# Altium PCB NetworkModule_highspeed V3.PcbDoc (part 3 of 3)
Units mm, origin at the board's own origin, x right, y up, seen from the top; angles counter-clockwise.
Board outline 21 x 36.1 mm, 6 copper layers (Top, GND, Inner3, Inner4, PWR, Bottom), stack 0.74 mm thick; 111 components, 125 nets, 539 pads, 397 vias.
Unrouted connection lines stored in the file: 274.
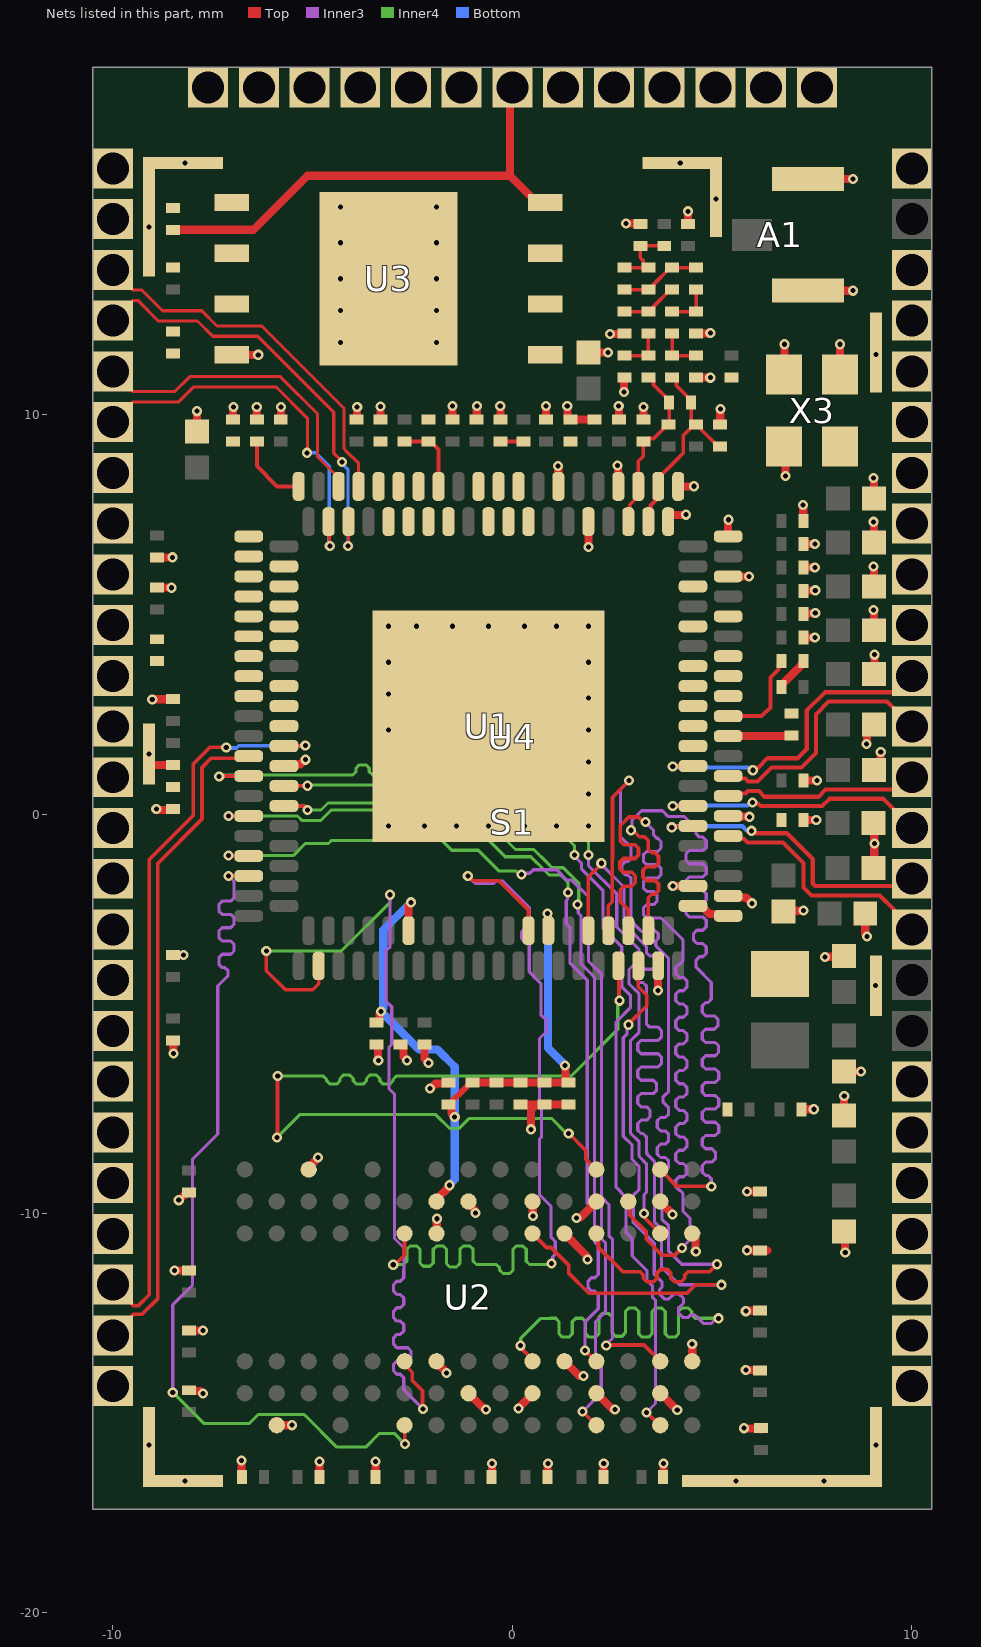
[diagram p7: the nets of this part, all layers, seen from the top]

## Via types
v1: diameter 0.254, hole 0.127, Top to Bottom, 397 vias

## Nets (pads, with @x,y where several pads share a name; then routed paths per layer and width w, separated by ;. In a path a pad name is that pad's centre, name@x,y a point inside that pad or via, vN(x,y) a via of type N, cw(c..) or ccw(c..) an arc to the next point about the centre after c; other vN are vias at no path point) (continued)
DDR_D9: U1.112 U2.C2 | length 23.2
  Top w0.092: U2.C2@2.9,-9.7 2.938,-9.738 2.938,-10.042 3.349,-10.453 3.349,-10.645 3.753,-11.049 4.058,-11.049 v1(4.246,-10.861) ; U1.112@2.9,-2.92 2.9,-2.392 2.794,-2.286 2.697,-2.189 2.697,-1.894 2.784,-1.807 2.988,-1.807 3.075,-1.72 3.075,-1.547 2.988,-1.461 2.779,-1.461 2.693,-1.374 2.693,-1.201 2.779,-1.114 3.069,-1.114 3.156,-1.028 3.156,-0.855 3.069,-0.768 2.784,-0.768 2.697,-0.681 2.697,-0.508 2.697,-0.293 2.913,-0.076 3.157,-0.076 3.284,-0.203 v1(3.327,-0.203)
  Inner3 w0.079: v1(3.327,-0.203) 3.531,-0.406 3.531,-0.483 3.531,-0.522 3.614,-0.605 3.637,-0.605 3.72,-0.688 3.72,-0.855 3.637,-0.938 3.36,-0.938 3.277,-1.021 3.277,-1.188 3.36,-1.271 3.637,-1.271 3.72,-1.354 3.72,-1.52 3.637,-1.604 3.36,-1.604 3.277,-1.687 3.277,-1.853 3.36,-1.936 3.535,-1.936 3.618,-2.02 3.618,-2.186 3.535,-2.269 3.36,-2.269 3.277,-2.352 3.277,-2.519 3.36,-2.602 3.719,-2.602 3.759,-2.642 4.268,-3.151 4.268,-3.302 4.268,-3.674 4.185,-3.757 4.173,-3.757 4.09,-3.841 4.09,-4.007 4.173,-4.09 4.284,-4.09 4.367,-4.173 4.367,-4.34 4.284,-4.423 4.173,-4.423 4.09,-4.506 4.09,-4.673 4.173,-4.756 4.284,-4.756 4.367,-4.839 4.367,-5.005 4.284,-5.088 4.173,-5.088 4.09,-5.172 4.09,-5.338 4.173,-5.421 4.284,-5.421 4.367,-5.504 4.367,-5.671 4.284,-5.754 4.173,-5.754 4.09,-5.837 4.09,-6.004 4.173,-6.087 4.284,-6.087 4.367,-6.17 4.367,-6.336 4.284,-6.42 4.173,-6.42 4.09,-6.503 4.09,-6.669 4.173,-6.752 4.284,-6.752 4.367,-6.836 4.367,-7.002 4.284,-7.085 4.173,-7.085 4.09,-7.168 4.09,-7.335 4.173,-7.418 4.284,-7.418 4.367,-7.501 4.367,-7.668 4.284,-7.751 4.173,-7.751 4.09,-7.834 4.09,-8 4.173,-8.083 4.284,-8.083 4.367,-8.167 4.367,-8.333 4.284,-8.416 4.173,-8.416 4.09,-8.499 4.09,-8.666 4.173,-8.749 4.284,-8.749 4.367,-8.832 4.367,-8.999 4.284,-9.082 4.173,-9.082 4.09,-9.165 4.09,-9.331 4.173,-9.415 4.185,-9.415 4.268,-9.498 4.268,-9.944 ; v1(4.246,-10.861) 4.445,-10.662 4.445,-10.121 4.268,-9.944 ; 4.268,-9.954 4.268,-9.944 ; 4.273,-9.948 4.277,-9.948
DDR_D10: U1.68 U2.D7 | length 22.9
  Top w0.092: v1(-7.112,-0.051) -6.604,-0.05 U1.68@-6.592,-0.038 ; v1(1.812,-13.43) 1.821,-13.43 2.091,-13.7 U2.D7@2.1,-13.7
  Inner3 w0.079: v1(1.391,-1.963) 1.378,-1.976 1.378,-2.141 1.345,-2.174 1.345,-2.746 1.445,-2.846 1.445,-3.734 1.873,-4.162 1.873,-9.743 2.053,-9.923 2.053,-10.706 2.075,-10.728 2.147,-10.8 2.147,-11.43 2.147,-11.526 2.064,-11.61 1.977,-11.61 1.893,-11.693 1.893,-11.859 1.977,-11.942 2.064,-11.942 2.147,-12.026 2.147,-12.065 2.147,-12.385 1.812,-12.72 v1(1.812,-13.43)
  Inner4 w0.078: v1(-7.112,-0.051) -5.382,-0.051 -5.266,-0.166 -4.806,-0.166 -4.542,0.097 -3.336,0.097 -3.285,0.148 -2.015,0.148 -1.964,0.097 -1.376,0.097 -0.731,-0.548 -0.703,-0.548 -0.181,-1.069 0.459,-1.069 0.805,-1.415 0.807,-1.415 0.915,-1.524 1.202,-1.524 1.356,-1.678 ; 1.356,-1.679 1.395,-1.718 1.395,-1.959 v1(1.391,-1.963)
DDR_D11: U1.110 U2.D3 | length 23.7
  Top w0.092: U2.D3@2.116,-10.516 2.154,-10.554 2.154,-10.85 2.76,-11.455 2.794,-11.455 3.186,-11.455 3.273,-11.542 3.273,-11.623 3.36,-11.709 3.533,-11.709 3.619,-11.623 3.619,-11.491 3.706,-11.404 3.879,-11.404 3.966,-11.491 3.966,-11.623 4.052,-11.709 4.225,-11.709 4.312,-11.623 4.312,-11.542 4.399,-11.455 4.642,-11.455 4.94,-11.455 v1(5.124,-11.271) ; U1.110@2.4,-2.92 2.4,-2.298 2.499,-2.199 2.499,-1.121 2.503,-1.116 2.503,0.42 v1(2.921,0.838)
  Inner3 w0.079: v1(2.921,0.838) 2.704,0.621 2.704,-0.568 2.972,-0.836 2.972,-0.914 2.972,-1.109 2.889,-1.192 2.828,-1.192 2.744,-1.275 2.744,-1.442 2.828,-1.525 2.889,-1.525 2.972,-1.608 2.972,-2.68 3.187,-2.896 3.207,-2.915 3.234,-2.943 3.352,-2.943 3.414,-2.881 3.532,-2.881 3.649,-2.998 3.649,-3.116 3.587,-3.178 3.587,-3.296 3.598,-3.306 3.626,-3.334 3.909,-3.617 3.909,-6.946 3.829,-7.026 3.766,-7.089 3.766,-7.206 3.909,-7.349 3.909,-7.516 3.826,-7.599 3.707,-7.599 3.624,-7.682 3.624,-7.848 3.707,-7.931 3.826,-7.931 3.909,-8.015 3.909,-8.181 3.826,-8.264 3.707,-8.264 3.624,-8.347 3.624,-8.514 3.707,-8.597 3.826,-8.597 3.909,-8.68 3.909,-8.847 3.826,-8.93 3.815,-8.93 3.732,-9.013 3.732,-9.576 3.741,-9.584 3.741,-10.142 3.909,-10.31 3.909,-10.945 4.235,-11.271 v1(5.124,-11.271)
DDR_D12: U1.111 U2.D1 | length 21.9
  Top w0.092: v1(-5.891,-8.096) -5.883,-8.088 -5.883,-6.569 v1(-5.875,-6.561) ; v1(1.408,-7.994) 1.832,-8.417 1.832,-8.632 1.997,-8.797 U2.D1@2.041,-8.797 ; U1.111@2.65,-3.8 2.667,-3.817 2.667,-4.657 v1(2.683,-4.674)
  Inner4 w0.078: v1(-5.891,-8.096) -5.314,-7.518 -4.877,-7.518 ; v1(-5.875,-6.561) -5.105,-6.561 -4.734,-6.561 -4.651,-6.644 -4.651,-6.68 -4.568,-6.763 -4.401,-6.763 -4.318,-6.68 -4.318,-6.621 -4.235,-6.537 -4.069,-6.537 -3.986,-6.621 -3.986,-6.68 -3.903,-6.763 -3.737,-6.763 -3.654,-6.68 -3.654,-6.621 -3.57,-6.537 -3.404,-6.537 -3.321,-6.621 -3.321,-6.68 -3.238,-6.763 -3.072,-6.763 -2.989,-6.68 -2.989,-6.644 -2.906,-6.561 -2.515,-6.561 1.466,-6.561 2.637,-5.39 2.637,-4.807 2.65,-4.794 2.65,-4.707 v1(2.683,-4.674) ; -4.877,-7.526 -1.918,-7.526 -1.575,-7.869 -1.334,-7.869 -1.09,-7.625 0.989,-7.625 1.314,-7.95 1.317,-7.95 1.361,-7.994 v1(1.408,-7.994)
DDR_D13: U1.67 U2.D9 | length 22.8
  Top w0.092: U1.67@-5.72,0.2 v1@-5.204,0.2 ; v1(1.753,-14.961) 1.761,-14.961 U2.D9@2.1,-15.3
  Inner3 w0.079: v1(1.625,-2.263) 1.647,-2.285 1.647,-2.477 1.715,-2.545 1.715,-3.749 2.053,-4.087 2.053,-9.668 2.234,-9.849 2.234,-10.631 2.255,-10.653 2.328,-10.726 2.328,-12.46 2.08,-12.707 2.08,-13.528 2.222,-13.67 2.222,-14.491 v1(1.753,-14.961)
  Inner4 w0.078: v1(-5.131,0.102) -4.793,0.102 -4.617,0.277 -3.411,0.277 -3.36,0.328 -1.94,0.328 -1.889,0.277 -0.798,0.277 -0.332,-0.189 -0.332,-0.481 0.076,-0.889 0.533,-0.889 0.88,-1.235 0.881,-1.235 0.99,-1.344 1.276,-1.344 1.659,-1.727 1.659,-2.23 v1(1.625,-2.263)
DDR_D14: U1.114 U2.B1 | length 23.4
  Top w0.092: v1(2.972,-0.406) 3.016,-0.406 3.177,-0.568 3.304,-0.568 3.4,-0.664 3.4,-0.838 3.4,-0.884 3.487,-0.971 3.567,-0.971 3.654,-1.058 3.654,-1.231 3.567,-1.317 3.355,-1.317 3.269,-1.404 3.269,-1.577 3.355,-1.664 3.567,-1.664 3.654,-1.75 3.654,-1.923 3.567,-2.01 3.487,-2.01 3.4,-2.096 3.4,-2.515 U1.114@3.4,-2.92 ; U2.B1@3.7,-8.9 4.122,-9.322 v1(4.978,-9.322)
  Inner3 w0.079: v1(2.972,-0.406) 2.99,-0.388 2.99,-0.161 3.232,0.081 3.757,0.081 3.902,-0.065 4.307,-0.065 4.597,-0.356 4.597,-0.457 4.597,-0.497 4.681,-0.58 4.768,-0.58 4.851,-0.663 4.851,-0.829 4.768,-0.913 4.427,-0.913 4.343,-0.996 4.343,-1.162 4.427,-1.245 4.768,-1.245 4.851,-1.329 4.851,-1.495 4.768,-1.578 4.427,-1.578 4.343,-1.661 4.343,-1.828 4.427,-1.911 4.768,-1.911 4.851,-1.994 4.851,-2.16 4.768,-2.244 4.427,-2.244 4.343,-2.327 4.343,-2.493 4.427,-2.576 4.768,-2.576 4.851,-2.66 4.851,-2.826 4.768,-2.909 4.618,-2.909 4.535,-2.992 4.535,-3.159 4.618,-3.242 4.768,-3.242 4.851,-3.325 4.851,-3.492 4.768,-3.575 4.681,-3.575 4.597,-3.658 4.597,-3.785 4.597,-3.835 4.978,-4.216 4.978,-4.394 4.978,-4.637 4.895,-4.721 4.833,-4.721 4.75,-4.804 4.75,-4.97 4.833,-5.053 5.059,-5.053 5.142,-5.137 5.142,-5.303 5.059,-5.386 4.833,-5.386 4.75,-5.469 4.75,-5.636 4.833,-5.719 5.074,-5.719 5.157,-5.802 5.157,-5.969 5.074,-6.052 4.833,-6.052 4.75,-6.135 4.75,-6.301 4.833,-6.385 5.081,-6.385 5.165,-6.468 5.165,-6.634 5.081,-6.717 4.833,-6.717 4.75,-6.801 4.75,-6.967 4.833,-7.05 5.081,-7.05 5.165,-7.133 5.165,-7.3 5.081,-7.383 4.833,-7.383 4.75,-7.466 4.75,-7.632 4.833,-7.716 5.081,-7.716 5.165,-7.799 5.165,-7.965 5.081,-8.048 4.833,-8.048 4.75,-8.132 4.75,-8.298 4.833,-8.381 4.997,-8.381 5.08,-8.464 5.08,-8.631 4.997,-8.714 4.833,-8.714 4.75,-8.797 4.75,-8.964 4.833,-9.047 4.895,-9.047 4.978,-9.13 4.978,-9.169 v1(4.978,-9.322)
DDR_D15: U1.65 U2.B9 | length 24.1
  Top w0.092: U1.65@-5.72,0.7 -5.716,0.704 -5.138,0.704 v1@-5.131,0.711 ; v1(3.353,-14.986) 3.369,-14.986 3.683,-15.3 U2.B9@3.7,-15.3
  Inner3 w0.079: v1(1.549,-1.029) 1.549,-1.052 1.725,-1.227 1.725,-1.368 2.263,-1.906 2.263,-2.846 2.738,-3.321 2.738,-4.324 2.952,-4.537 2.952,-4.85 2.594,-5.207 2.594,-9.345 2.839,-9.59 2.839,-10.472 3,-10.633 3,-11.064 3.368,-11.432 3.368,-11.674 3.504,-11.809 3.504,-12.094 3.581,-12.171 3.581,-14.757 v1(3.353,-14.986)
  Inner4 w0.078: v1@-5.131,0.711 -5.117,0.725 -3.5,0.725 -3.429,0.796 -0.059,0.796 0.832,-0.095 0.832,-0.411 0.989,-0.568 1.33,-0.568 1.549,-0.787 v1(1.549,-1.029)
  other v1: -5.131,0.708
DDR_LDM: U1.108 U2.F3 | length 23.5
  Top w0.092: U2.F3@0.5,-10.5 0.852,-10.852 0.966,-10.852 1.413,-11.3 1.413,-11.505 1.908,-11.999 4.369,-11.999 4.582,-11.786 v1(5.232,-11.786) ; U1.108@1.9,-2.92 1.9,-1.58 2.224,-1.256 v1(2.224,-1.233)
  Inner3 w0.079: v1(2.224,-1.233) 2.224,-1.26 2.791,-1.827 2.791,-2.755 3.051,-3.014 3.202,-3.165 3.353,-3.316 3.353,-3.429 3.353,-3.468 3.436,-3.552 3.505,-3.552 3.588,-3.635 3.588,-3.801 3.505,-3.884 3.182,-3.884 3.099,-3.968 3.099,-4.134 3.182,-4.217 3.27,-4.217 3.353,-4.3 3.353,-4.521 3.353,-4.547 3.353,-5.252 3.436,-5.335 3.646,-5.335 3.729,-5.418 3.729,-5.584 3.646,-5.668 3.219,-5.668 3.135,-5.751 3.135,-5.917 3.219,-6 3.646,-6 3.729,-6.084 3.729,-6.25 3.646,-6.333 3.219,-6.333 3.135,-6.416 3.135,-6.583 3.219,-6.666 3.527,-6.666 3.61,-6.749 3.61,-6.915 3.527,-6.999 3.219,-6.999 3.135,-7.082 3.135,-7.248 3.219,-7.331 3.362,-7.331 3.445,-7.415 3.445,-7.581 3.362,-7.664 3.219,-7.664 3.135,-7.747 3.135,-7.914 3.219,-7.997 3.27,-7.997 3.353,-8.08 3.353,-8.447 3.363,-8.457 3.363,-8.508 3.552,-8.696 3.552,-9.246 3.552,-9.88 3.56,-9.888 3.56,-10.216 3.729,-10.385 3.729,-11.332 4.183,-11.786 v1(5.232,-11.786)
DDR_LDQS: U1.113 U2.F7 | length 22.6
  Top w0.092: v1(0.203,-13.31) 0.203,-13.353 0.508,-13.658 U2.F7@0.508,-13.665 ; v1(2.904,-5.276) 2.904,-5.256 3.36,-4.801 3.36,-4.534 3.15,-4.325 U1.113@3.15,-3.8
  Inner3 w0.079: v1(2.904,-5.276) 2.871,-5.309 2.871,-5.505 2.775,-5.601 2.775,-8.063 2.992,-8.281 2.992,-8.647 3.172,-8.827 3.172,-9.399 3.024,-9.547 3.024,-10.224 3.548,-10.748 3.548,-11.524 3.632,-11.608 3.66,-11.636 3.746,-11.722 3.746,-11.839 3.684,-11.901 3.684,-12.019 3.802,-12.136 3.919,-12.136 4.048,-12.008 4.165,-12.008 4.283,-12.126 4.283,-12.243 4.155,-12.372 4.155,-12.489 4.272,-12.607 4.39,-12.607 4.452,-12.545 4.57,-12.545 4.597,-12.573 4.775,-12.751 4.982,-12.751 5.109,-12.624 v1(5.156,-12.624)
  Inner4 w0.078: v1(0.203,-13.31) 0.209,-13.304 0.209,-13.127 0.474,-12.862 0.711,-12.625 0.94,-12.625 ; 0.94,-12.624 1.083,-12.624 1.166,-12.707 1.166,-13.011 1.249,-13.094 1.415,-13.094 1.498,-13.011 1.498,-12.707 1.581,-12.624 1.748,-12.624 1.831,-12.707 1.831,-13.011 1.914,-13.094 2.08,-13.094 2.163,-13.011 2.163,-12.591 2.246,-12.507 2.412,-12.507 2.495,-12.591 2.495,-12.989 2.579,-13.073 2.745,-13.073 2.828,-12.989 2.828,-12.453 2.911,-12.37 3.077,-12.37 3.16,-12.453 3.16,-13.011 3.243,-13.094 3.41,-13.094 3.493,-13.011 3.493,-12.453 3.576,-12.37 3.742,-12.37 3.825,-12.453 3.825,-13.011 3.908,-13.094 4.074,-13.094 4.157,-13.011 4.157,-12.453 4.241,-12.37 4.407,-12.37 4.49,-12.453 4.49,-12.541 4.573,-12.624 4.902,-12.624 v1(5.156,-12.624)
DDR_ODT: U1.74 U2.K9 | length 22.9
  Top w0.092: v1(-7.112,-1.549) U1.74@-6.6,-1.55 ; v1(-2.692,-15.773) -2.696,-15.77 -2.696,-15.269 U2.K9@-2.692,-15.265
  Inner3 w0.079: v1(-8.504,-14.478) -8.504,-12.287 -8.009,-11.792 -8.009,-8.644 -7.376,-8.011 -7.376,-4.304 -7.157,-4.085 -7.117,-4.045 -7.117,-3.928 -7.201,-3.844 -7.265,-3.844 -7.348,-3.761 -7.348,-3.595 -7.265,-3.512 -7.054,-3.512 -6.971,-3.428 -6.971,-3.262 -7.054,-3.179 -7.265,-3.179 -7.348,-3.096 -7.348,-2.929 -7.265,-2.846 -7.054,-2.846 -6.971,-2.763 -6.971,-2.596 -7.054,-2.513 -7.265,-2.513 -7.348,-2.43 -7.348,-2.264 -7.265,-2.18 -7.054,-2.18 -6.971,-2.097 -6.971,-1.803 -6.971,-1.69 v1(-7.112,-1.549)
  Inner4 w0.078: v1(-8.504,-14.478) -7.728,-15.254 -6.582,-15.254 -6.36,-15.032 -5.214,-15.032 -4.396,-15.85 -3.672,-15.85 -3.328,-15.506 -2.96,-15.506 v1(-2.692,-15.773)
DDR_RAS: U1.81 U2.K7 | length 22.7
  Top w0.092: v1(-6.162,-3.429) -6.162,-3.922 -5.684,-4.4 -5,-4.4 -4.85,-4.25 U1.81@-4.85,-3.8 ; U2.K7@-2.7,-13.7 -2.7,-13.785 -2.509,-13.976 -2.509,-14.178 -2.251,-14.437 -2.251,-14.883 v1(-2.241,-14.892)
  Inner3 w0.079: v1(-3.062,-2.022) -3.062,-3.323 -3.166,-3.427 -3.166,-4.682 -3.023,-4.825 -3.023,-5.769 -3.09,-5.836 -3.09,-6.877 -2.952,-7.015 -2.952,-10.628 -2.715,-10.864 -2.715,-11.395 -2.721,-11.401 -2.721,-11.506 -2.721,-11.613 -2.805,-11.696 -2.892,-11.696 -2.975,-11.779 -2.975,-11.945 -2.892,-12.029 -2.805,-12.029 -2.721,-12.112 -2.721,-12.278 -2.805,-12.361 -2.892,-12.361 -2.975,-12.445 -2.975,-12.611 -2.892,-12.694 -2.805,-12.694 -2.721,-12.777 -2.721,-12.944 -2.805,-13.027 -2.892,-13.027 -2.975,-13.11 -2.975,-13.276 -2.892,-13.36 -2.622,-13.36 -2.539,-13.443 -2.539,-13.609 -2.622,-13.692 -2.892,-13.692 -2.975,-13.776 -2.975,-13.942 -2.892,-14.025 -2.805,-14.025 -2.721,-14.108 -2.721,-14.148 -2.721,-14.414 -2.243,-14.892 v1(-2.241,-14.892)
  Inner4 w0.078: v1(-6.162,-3.429) -4.285,-3.429 -3.062,-2.206 v1(-3.062,-2.022)
DDR_UDM: U1.64 U2.B3 | length 22.9
  Top w0.092: v1(-7.341,0.94) -7.33,0.95 U1.64@-6.6,0.95 ; v1(3.292,-9.999) 3.323,-10.03 3.323,-10.123 U2.B3@3.7,-10.5
  Inner3 w0.079: v1(1.905,-1.029) 1.905,-1.293 2.611,-1.999 2.611,-2.829 3.172,-3.391 3.172,-3.639 2.918,-3.893 2.918,-4.249 3.172,-4.503 3.172,-5.459 2.955,-5.676 2.955,-7.988 3.172,-8.206 3.172,-8.572 3.353,-8.753 3.353,-9.474 3.292,-9.534 v1(3.292,-9.999)
  Inner4 w0.078: v1(-7.341,0.94) -7.307,0.973 -7.21,0.973 -7.207,0.976 -4.039,0.976 -3.999,0.976 -3.916,1.059 -3.916,1.147 -3.833,1.23 -3.667,1.23 -3.584,1.147 -3.584,1.059 -3.501,0.976 -3.335,0.976 -3.252,1.059 -3.252,1.147 -3.168,1.23 -3.002,1.23 -2.919,1.147 -2.919,1.059 -2.836,0.976 -2.67,0.976 -2.587,1.059 -2.587,1.147 -2.504,1.23 -2.337,1.23 -2.254,1.147 -2.254,1.059 -2.171,0.976 -2.005,0.976 -1.922,1.059 -1.922,1.147 -1.839,1.23 -1.673,1.23 -1.59,1.147 -1.59,1.059 -1.506,0.976 -1.092,0.976 0.218,0.976 1.905,-0.711 v1(1.905,-1.029)
DDR_UDQS: U1.72 U2.B7 | length 23.5
  Top w0.092: v1(-7.112,-1.041) -7.108,-1.046 -6.604,-1.046 U1.72@-6.6,-1.05 ; v1(2.348,-13.304) 2.36,-13.292 3.292,-13.292 U2.B7@3.7,-13.7
  Inner3 w0.079: v1(0.23,-1.517) 0.264,-1.483 0.431,-1.483 0.518,-1.396 1.105,-1.396 1.363,-1.654 1.481,-1.654 1.902,-2.075 1.902,-3.682 2.234,-4.013 2.234,-9.594 2.414,-9.774 2.414,-10.557 2.508,-10.651 2.508,-13.117 2.348,-13.277 v1(2.348,-13.304)
  Inner4 w0.078: v1(-7.112,-1.041) -5.489,-1.041 -5.186,-0.739 -4.604,-0.739 -4.524,-0.659 -3.326,-0.659 -3.312,-0.645 -1.783,-0.645 -1.52,-0.908 -0.852,-0.908 -0.331,-1.429 0.095,-1.429 0.183,-1.517 v1(0.23,-1.517)
DDR_VREF: C4.1 C5.1 C11.2 C12.1 C13.1 R1.1 R2.2 U1.90 U1.104 U2.J2 | length 18.5
  Top w0.152: C4.1@-1.55,-7.275 -1.501,-7.226 -1.501,-7.178 -1.247,-6.924 -1.247,-6.922 -1.031,-6.706 C11.2@-0.965,-6.706
  Top w0.203: C12.1@-3.398,-5.21 -3.391,-5.202 -3.327,-5.202 -3.327,-4.992 -3.291,-4.956 v1(-3.291,-4.942) ; U1.90@-2.6,-2.92 -2.6,-2.287 -2.538,-2.224 v1(-2.538,-2.211) ; U2.J2@-1.9,-9.7 -1.9,-9.645 -1.588,-9.333 -1.588,-9.303 v1(-1.578,-9.293) ; C4.1@-1.6,-7.275 -1.55,-7.275 -1.527,-7.298 -1.527,-7.492 -1.445,-7.574 v1(-1.445,-7.587) ; C11.2@-1,-6.725 R1.1@-0.4,-6.725 R2.2@0.2,-6.725 C13.1@0.8,-6.725 1.327,-6.725 1.327,-6.319 1.315,-6.307 v1(1.315,-6.293) ; v1(0.881,-2.489) 0.891,-2.498 0.891,-2.911 U1.104@0.9,-2.92
  Bottom w0.203: v1@-3.291,-4.929 -3.266,-4.903 -3.266,-4.883 -3.235,-4.852 -3.235,-2.908 v1@-2.547,-2.22 ; v1@-3.28,-4.953 -2.341,-5.893 -1.88,-5.893 -1.445,-6.327 -1.445,-7.601 -1.445,-9.149 -1.578,-9.282 v1(-1.578,-9.293) ; v1(0.881,-2.489) 0.889,-2.496 0.889,-5.854 1.315,-6.28 v1(1.315,-6.293)
DDR_WE: U1.102 U2.K3 | length 22.3
  Top w0.092: v1(-2.983,-11.283) -2.94,-11.283 -2.807,-11.15 ; -2.806,-11.15 -2.702,-11.047 -2.702,-10.526 U2.K3@-2.692,-10.516 ; v1(-1.118,-1.549) -1.104,-1.549 -0.983,-1.67 -0.335,-1.67 0.4,-2.405 U1.102@0.4,-2.92
  Inner3 w0.079: v1(-1.118,-1.549) -0.926,-1.741 -0.469,-1.741 -0.407,-1.678 -0.244,-1.678 0.422,-2.344 0.422,-2.413 0.422,-2.785 0.339,-2.868 0.309,-2.868 0.226,-2.952 0.226,-3.118 0.309,-3.201 0.339,-3.201 0.422,-3.284 0.422,-3.683 0.422,-3.953 0.711,-4.242 0.711,-4.512 0.711,-5.026 0.852,-5.166 0.852,-5.444 0.676,-5.619 0.676,-7.201 0.73,-7.255 0.73,-8.083 0.676,-8.137 0.676,-9.532 0.968,-9.824 0.968,-10.599 1.07,-10.701 1.07,-11.017 1.008,-11.08 1.008,-11.216 v1(0.974,-11.249)
  Inner4 w0.078: v1(-2.983,-11.283) -2.978,-11.278 -2.769,-11.278 -2.729,-11.278 -2.646,-11.195 -2.646,-10.897 -2.563,-10.813 -2.397,-10.813 -2.314,-10.897 -2.314,-11.238 -2.231,-11.321 -2.065,-11.321 -1.982,-11.238 -1.982,-10.897 -1.898,-10.813 -1.732,-10.813 -1.649,-10.897 -1.649,-11.256 -1.566,-11.339 -1.4,-11.339 -1.317,-11.256 -1.317,-10.897 -1.234,-10.813 -1.067,-10.813 -0.984,-10.897 -0.984,-11.195 -0.901,-11.278 -0.403,-11.278 -0.32,-11.361 -0.32,-11.421 -0.236,-11.504 -0.07,-11.504 0.013,-11.421 0.013,-10.897 0.096,-10.813 0.262,-10.813 0.345,-10.897 0.345,-11.195 0.428,-11.278 0.508,-11.278 0.945,-11.278 v1(0.974,-11.249)
EPHY_VRT: R23.1 U1.39 | length 1.9
  Top w0.102: R23.1@-6.4,9.325 -6.4,8.711 -5.889,8.2 U1.39@-5.35,8.2
ETH_RN: U1.34 U4.B4 | length 11
  Top w0.079: U4.B4@-10,12.35 -9.493,12.856 -9.381,12.856 -8.866,12.341 -7.884,12.341 -7.503,11.96 -6.38,11.96 -4.473,10.053 -4.473,9.035 -4.267,8.829 v1(-4.267,8.814) ; v1(-4.115,6.706) -4.107,6.713 -4.107,7.313 U1.34@-4.1,7.32
  Bottom w0.079: v1(-4.267,8.814) -4.267,8.771 -4.115,8.619 v1(-4.115,6.706)
ETH_RP: U1.33 U4.B3 | length 9.3
  Top w0.079: U4.B3@-10,13.62 -9.493,13.113 -9.275,13.113 -8.759,12.598 -7.777,12.598 -7.396,12.217 -6.274,12.217 -4.216,10.16 -4.216,9.142 -4.157,9.082 -3.85,8.776 U1.33@-3.85,8.2
ETH_TN: U1.36 U4.B6 | length 9.8
  Top w0.079: U4.B6@-10,9.81 -9.493,10.316 -8.353,10.316 -7.976,10.693 -5.92,10.693 -5.134,9.907 -5.134,9.054 v1(-5.145,9.042) ; U1.36@-4.6,7.32 -4.586,7.306 -4.586,6.72 v1(-4.572,6.706)
  Bottom w0.079: v1(-5.145,9.042) -4.922,9.042 -4.586,8.706 -4.586,6.72 v1(-4.572,6.706)
ETH_TP: U1.35 U4.B5 | length 7.9
  Top w0.079: U4.B5@-10,11.08 -9.493,10.573 -8.459,10.573 -8.082,10.95 -5.813,10.95 -4.877,10.014 -4.877,8.937 -4.35,8.41 U1.35@-4.35,8.2
GND: A1.2 A1.3 C1.2 C2.2 C3.2 C4.2 C5.2 C6.2 C7.2 C8.2 C9.2 C10.2 C12.2 C13.2 C14.2 C15.2 C16.2 C17.2 C18.2 C19.2 C20.2 C21.2 C22.2 C23.2 C24.2 C25.2 C26.2 C27.2 C28.2 C29.2 C30.2 C31.2 C32.2 C33.2 C34.2 C35.2 C36.2 C37.2 C38.2 C39.2 C40.2 C41.2 C42.2 C43.2 C44.2 C45.2 C46.2 C47.2 C48.2 C49.2 C50.2 C51.1 C52.2 C54.2 C55.2 C58.2 C61.2 C62.2 C63.1 C64.2 C65.2 C66.2 C67.2 C68.2 C69.2 C70.2 C71.2 C72.2 C73.2 L5.2 R2.1 R8.1 R15.1 R17.1 R18.1 R19.1 R23.2 R24.2 S1.1 S1.2 S1.3 S1.4 S1.5 S1.6 S1.7 S1.8 S1.9 S1.10 S1.11 U1.1 U1.2 U1.7 U1.10 U1.13 U1.63 U1.115 U1.120 U1.121 U1.128 U1.152 U1.156 U1.157 U2.A3 U2.A7 U2.B2 U2.B8 U2.D2 U2.D8 U2.E3 U2.E7 U2.F2 U2.F8 U2.H2 U2.H8 U2.J3 U2.J7 U2.N1 U2.P9 U3.4 U3.9 U4.B25 U4.C1 U4.C3 U4.C4 U4.C25 X3.1 X3.2 X3.4 | length 52
  Top w0.203: S1.2@-9.093,1.473 -9.093,1.267 -9.052,1.225 C34.2@-8.5,1.225 ; v1(-9.017,2.87) -9.015,2.873 -8.502,2.873 C23.2@-8.5,2.875 ; v1@-8.915,0.102 -8.523,0.102 R24.2@-8.5,0.125 ; C14.2@-8.9,5.675 -8.895,5.67 -8.54,5.67 v1(-8.534,5.664) ; C16.2@-8.9,6.425 v1(-8.509,6.426) ; C3.2@-8.5,-5.675 -8.492,-5.683 -8.492,-5.986 v1(-8.484,-5.994) ; C1.2@-8.5,-3.525 -8.497,-3.528 -8.239,-3.528 v1(-8.236,-3.531) ; v1(-8.458,-11.43) -8.456,-11.428 -8.102,-11.428 C73.2@-8.1,-11.425 ; v1(-8.354,-9.668) -8.343,-9.668 -8.15,-9.475 C9.2@-8.1,-9.475 ; C71.2@-8.1,-14.425 -8.077,-14.448 -7.818,-14.448 -7.761,-14.506 v1(-7.747,-14.506) ; C72.2@-8.1,-12.925 -8.098,-12.927 -7.749,-12.927 v1(-7.747,-12.929) ; C35.2@-7.899,9.576 v1@-7.899,10.058 ; U3.4@-7.024,11.495 v1(-6.364,11.495) ; R17.1@-7,9.875 -6.993,9.883 -6.993,10.178 v1(-6.985,10.185) ; v1(-6.782,-16.18) -6.778,-16.183 -6.778,-16.597 C10.2@-6.775,-16.6 ; R23.2@-6.4,9.875 v1(-6.401,10.185) ; U2.P9@-5.9,-15.3 v1(-5.514,-15.3) ; v1(-5.791,10.185) -5.796,10.181 -5.796,9.898 C17.2@-5.782,9.885 ; U1.63@-5.72,1.2 -5.674,1.246 -5.309,1.246 -5.195,1.36 v1(-5.182,1.36) ; U2.N1@-5.1,-8.9 -5.1,-8.845 -4.865,-8.611 v1(-4.865,-8.597) ; C70.2@-4.825,-16.6 v1(-4.826,-16.205) ; C15.2@-3.893,9.875 -3.893,10.178 v1(-3.886,10.185) ; v1(-3.429,-16.205) -3.427,-16.207 -3.427,-16.598 C67.2@-3.425,-16.6 ; C12.2@-3.4,-5.775 -3.391,-5.775 -3.368,-5.798 -3.368,-6.162 v1(-3.358,-6.172) ; R18.1@-3.3,9.875 v1(-3.3,10.2) ; C22.2@-2.8,-5.775 -2.75,-5.775 -2.727,-5.798 -2.727,-6.073 -2.642,-6.158 v1(-2.642,-6.172) ; C20.2@-2.2,-5.775 -2.2,-5.793 -2.205,-5.798 -2.205,-6.124 -2.098,-6.231 v1(-2.098,-6.234) ; v1(-2.06,-6.869) -2.046,-6.869 -1.925,-6.748 -1.623,-6.748 C4.2@-1.6,-6.725 ; U2.J7@-1.9,-13.7 -1.9,-13.733 -1.651,-13.982 v1(-1.651,-13.995) ; U2.J3@-1.9,-10.5 -1.895,-10.495 -1.895,-10.137 v1(-1.889,-10.132) ; C19.2@-1.499,9.876 v1@-1.499,10.199 ; U2.H8@-1.1,-14.5 -0.7,-14.9 -0.67,-14.9 v1(-0.66,-14.91) ; U2.H2@-1.1,-9.7 -1.1,-9.755 -0.936,-9.919 -0.936,-9.98 v1(-0.926,-9.99) ; C24.2@-0.9,9.875 -0.894,9.881 -0.894,10.194 v1@-0.9,10.2 ; v1@-0.894,10.205 v1(-0.889,10.211) ; C69.2@-0.525,-16.6 -0.516,-16.591 -0.516,-16.264 v1(-0.508,-16.256) ; v1(-0.305,10.211) v1@-0.302,10.208 ; R19.1@-0.3,9.875 -0.302,9.877 -0.302,10.198 v1@-0.3,10.2 ; v1(0.152,-14.884) 0.152,-14.871 0.5,-14.523 U2.F8@0.5,-14.5 ; R2.1@0.25,-7.275 0.594,-7.275 ; v1(0.462,-7.893) 0.462,-7.406 0.594,-7.275 ; U2.F2@0.5,-9.7 0.508,-9.708 0.508,-10.055 v1(0.515,-10.062) ; C43.2@0.838,9.876 v1(0.838,10.211) ; C68.2@0.875,-16.6 0.882,-16.593 0.882,-16.263 v1(0.889,-16.256) ; v1(1.143,8.712) 1.147,8.709 1.147,8.204 U1.13@1.15,8.2 ; U2.E7@1.3,-13.7 1.662,-14.062 1.768,-14.062 v1(1.778,-14.072) ; U2.E3@1.3,-10.5 1.87,-11.07 1.87,-11.141 v1(1.879,-11.151) ; v1(1.372,10.211) 1.381,10.201 1.381,9.9 1.405,9.876 R15.1@1.448,9.876 R15.1@1.452,9.876 ; C5.2@1.441,-7.275 0.803,-7.275 0.594,-7.275 ; R15.1@1.448,9.881 R15.1@1.452,9.876 ; v1(1.605,-10.109) 1.615,-10.099 1.7,-10.099 U2.D2@2.1,-9.7 ; U1.10@1.9,7.32 1.903,7.318 1.903,6.683 v1(1.905,6.68) ; C42.2@1.9,11.55 1.902,11.552 2.395,11.552 v1(2.396,11.553) ; C46.2@2.057,9.876 R15.1@1.452,9.876 ; U2.D8@2.1,-14.5 2.5,-14.9 2.556,-14.9 v1(2.565,-14.91) ; C8.2@2.275,-16.6 2.281,-16.595 2.281,-16.261 v1(2.286,-16.256) ; v1(2.438,12.014) 2.444,12.02 2.795,12.02 L5.2@2.8,12.025 ; v1(2.632,8.728) 2.641,8.719 2.641,8.209 U1.7@2.65,8.2 ; v1@2.659,10.237 2.667,10.23 C47.2@2.667,9.876 ; v1(2.794,10.566) 2.797,10.569 2.797,10.922 C55.2@2.8,10.925 ; v1(2.845,14.783) 2.849,14.779 3.196,14.779 C61.2@3.2,14.775 ; C51.1@3.277,9.876 3.278,9.877 3.278,10.186 v1(3.279,10.187) ; v1(3.641,-4.42) 3.646,-4.415 3.646,-3.804 U1.115@3.65,-3.8 ; U2.B8@3.7,-14.5 3.703,-14.5 4.122,-14.919 v1(4.125,-14.919) ; U2.B2@3.734,-9.728 3.734,-9.743 4.009,-10.018 v1(4.009,-10.027) ; C7.2@3.775,-16.6 3.78,-16.595 3.78,-16.261 v1(3.785,-16.256) ; U1.2@3.9,7.32 3.948,7.368 3.948,7.483 4.334,7.483 v1(4.343,7.493) ; v1(4.015,-1.802) v1(4.015,-1.802) 4.519,-1.801 U1.121@4.52,-1.8 ; U1.1@4.15,8.2 4.152,8.202 4.545,8.202 v1(4.547,8.204) ; v1(4.394,15.088) 4.397,15.085 4.397,14.778 C62.2@4.4,14.775 ; U2.A7@4.5,-13.7 v1(4.5,-13.268) ; U2.A3@4.5,-10.5 4.5,-10.555 4.581,-10.636 4.581,-10.94 v1(4.59,-10.95) ; C54.2@4.6,10.925 4.602,10.924 4.952,10.924 v1(4.953,10.922) ; C58.2@4.6,12.025 4.607,12.032 4.946,12.032 v1(4.953,12.04) ; C52.2@5.127,9.773 5.203,9.773 5.203,10.131 v1(5.207,10.135) ; U1.120@5.4,-2.05 5.439,-2.089 5.85,-2.089 5.994,-2.233 v1(5.994,-2.235) ; U1.128@5.4,-0.05 5.41,-0.06 5.922,-0.06 v1(5.932,-0.07) ; U1.152@5.4,5.95 v1@5.875,5.95 ; U1.156@5.4,6.95 v1@5.4,7.275 ; v1(5.8,-15.375) 5.81,-15.385 6.21,-15.385 C2.2@6.225,-15.4 ; v1(5.842,-13.919) 5.845,-13.922 6.197,-13.922 C65.2@6.2,-13.925 ; v1(5.842,-12.446) 5.852,-12.436 6.189,-12.436 C64.2@6.2,-12.425 ; v1(5.867,-10.922) 5.869,-10.923 6.225,-10.923 6.376,-10.923 6.377,-10.925 ; v1(5.867,-9.449) C6.2@6.146,-9.449 ; C26.2@6.582,-2.438 6.597,-2.423 7.28,-2.423 v1(7.29,-2.413) ; X3.1@6.807,11.107 v1(6.807,11.76) ; v1(6.833,8.458) X3.2@6.833,9.067 ; C50.2@7.235,-7.391 v1(7.544,-7.391) ; C37.2@7.275,6.194 7.296,6.172 v1(7.569,6.172) ; C39.2@7.275,6.725 7.306,6.756 v1(7.569,6.756) ; v1(7.275,7.737) 7.28,7.731 7.28,7.346 C45.2@7.285,7.341 ; R8.1@7.285,-0.152 v1(7.605,-0.152) ; C63.1@7.286,0.839 v1@7.621,0.839 ; C18.2@7.285,5.004 7.303,5.022 7.57,5.022 v1(7.58,5.031) ; C41.2@7.291,5.532 7.291,5.576 7.309,5.594 7.574,5.594 v1(7.58,5.6) ; C21.2@7.397,4.42 v1(7.569,4.42) ; A1.2@7.4,13.1 v1(8.529,13.1) ; A1.3@7.4,15.9 v1(8.529,15.9) ; v1(7.823,-3.581) 7.833,-3.572 8.102,-3.572 8.2,-3.473 C31.2@8.2,-3.468 ; C48.2@8.2,-10.45 8.321,-10.572 8.321,-10.963 v1(8.331,-10.973) ; C49.2@8.2,-7.55 8.303,-7.447 8.303,-7.064 v1(8.306,-7.061) ; C30.2@8.2,-6.45 v1(8.729,-6.45) ; X3.4@8.204,11.104 v1(8.204,11.76) ; C25.2@8.832,-2.389 8.832,-3.006 8.875,-3.049 v1(8.875,-3.063) ; C27.2@8.847,-1.4 C27.2@8.856,-1.409 ; v1(8.865,1.753) 8.874,1.762 8.874,2.056 C32.2@9.053,2.235 ; C28.2@9.039,-0.229 C28.2@9.04,-0.231 ; C27.2@9.042,-1.372 9.058,-1.356 9.058,-0.746 v1(9.068,-0.737) 9.058,-0.727 9.058,-0.315 C28.2@9.093,-0.279 ; v1(9.042,5.105) 9.046,5.102 9.046,4.604 C40.2@9.05,4.6 C40.2@9.05,4.699 ; v1(9.042,6.198) 9.046,6.194 9.046,5.704 C36.2@9.05,5.7 C36.2@9.05,5.842 ; v1(9.042,7.315) 9.046,7.311 9.046,6.669 9.058,6.657 9.05,6.649 C38.2@9.05,6.807 ; v1(9.042,8.407) 9.046,8.404 9.046,7.904 C44.2@9.05,7.9 ; C29.2@9.05,1.1 9.21,1.26 9.21,1.54 v1(9.22,1.549) ; C33.2@9.05,3.5 9.068,3.518 v1@9.068,3.962
  other v1: -8.2,-16.7 5.6,-16.7 7.8,-16.7 -9.1,-15.8 9.1,-15.8 9.093,-4.293 -3.1,-0.3 -2.2,-0.3 -1.4,-0.3 -0.6,-0.3 0.3,-0.3 1.1,-0.3 1.9,-0.3 -8.915,0.127 1.9,0.5 7.621,0.84 1.9,1.3 -9.1,1.5 -3.1,2.1 1.9,2.1 1.9,2.9 -3.1,3 -3.1,3.8 1.9,3.8 9.068,3.988 -3.1,4.7 -2.4,4.7 -1.5,4.7 -0.6,4.7 0.3,4.7 1.1,4.7 1.9,4.7 5.925,5.95 5.41,7.366 -7.899,10.084 -1.499,10.211 2.659,10.212 9.1,11.5 -4.3,11.8 -1.9,11.8 -4.3,12.6 -1.9,12.6 -4.3,13.4 -1.9,13.4 -4.3,14.3 -1.9,14.3 -9.1,14.7 -4.3,15.2 -1.9,15.2 5.1,15.4 -8.2,16.3 4.2,16.3
I2C_SCL: U1.20 U4.A5
I2C_SDA: U1.21 U4.A6
I2S_CLK: U1.19 U4.A4
I2S_SDI: U1.16 U4.A1
I2S_SDO: R15.2 U1.17 U4.A2
I2S_WS: U1.18 U4.A3
IO11: U1.29 U4.A13
IO14: U1.40 U4.B7
IO15: U1.42 U4.B8
IO16: U1.43 U4.B9
IO17: U1.44 U4.B10 | length 0.2
  Top w0.102: U1.44@-6.81,5.95 U1.44@-6.6,5.95
IO38: R8.2 U1.137 U4.C22
IO44: U1.144 U4.C7
JTAG_TCK: U1.140 U4.C19
JTAG_TDI: U1.142 U4.C9
JTAG_TDO: U1.143 U4.C8
JTAG_TMS: U1.141 U4.C10
JTAG_TRST: U1.139 U4.C20
LXBK: L1.1 U1.118 U1.119 | length 0.9
  Top w0.203: U1.119@4.52,-2.3 4.732,-2.3 4.936,-2.504 5.298,-2.504 U1.118@5.359,-2.565
PCIE_CKN: U1.132 U4.C12 | length 6.3
  Top w0.104: U1.132@5.415,0.95 5.48,0.885 5.831,0.885 5.901,0.815 6.133,0.815 6.485,1.167 7.237,1.167 7.597,1.526 7.597,2.496 7.917,2.816 9.374,2.816 U4.C12@10,2.19
PCIE_CKP: U1.133 U4.C11 | length 8.1
  Top w0.104: v1(4.013,1.194) 4.016,1.197 4.517,1.197 U1.133@4.52,1.2 ; v1(6.017,1.095) 6.057,1.095 6.118,1.156 6.148,1.156 6.389,1.398 7.142,1.398 7.366,1.622 7.366,2.591 7.821,3.046 9.586,3.046 U4.C11@10,3.46
  Bottom w0.104: v1(4.013,1.194) 4.04,1.167 5.904,1.167 5.976,1.095 v1(6.017,1.095)
PCIE_RXN: U1.130 U4.C13 | length 4.9
  Top w0.104: U1.130@5.4,0.45 5.465,0.515 5.834,0.515 5.891,0.572 6.168,0.572 6.31,0.431 7.658,0.431 7.839,0.612 9.692,0.612 U4.C13@10,0.92
PCIE_RXP: U1.129 U4.C14 | length 7
  Top w0.104: v1(4.013,0.203) 4.015,0.202 4.518,0.202 U1.129@4.52,0.2 ; v1(6.007,0.292) 6.036,0.263 6.151,0.263 6.214,0.2 7.754,0.2 7.935,0.381 9.285,0.381 9.552,0.114 9.552,0.098 U4.C14@10,-0.35
  Bottom w0.104: v1(4.013,0.203) 4.021,0.211 5.885,0.211 5.966,0.292 v1(6.007,0.292)
PCIE_TXN: U1.126 U4.C16 | length 6
  Top w0.104: U1.126@5.4,-0.55 5.465,-0.615 5.786,-0.615 5.883,-0.712 6.772,-0.712 7.288,-1.227 7.288,-1.84 7.484,-2.036 9.196,-2.036 9.552,-2.392 9.552,-2.442 U4.C16@10,-2.89
PCIE_TXP: U1.127 U4.C15 | length 7.6
  Top w0.104: v1(3.988,-0.333) 4.004,-0.316 4.504,-0.316 U1.127@4.52,-0.3 ; v1(5.989,-0.421) 6.029,-0.421 6.09,-0.481 6.868,-0.481 7.518,-1.131 7.518,-1.744 7.579,-1.805 9.815,-1.805 U4.C15@10,-1.62
  Bottom w0.104: v1(3.988,-0.333) 4.016,-0.305 5.753,-0.305 5.858,-0.409 5.977,-0.409 v1(5.989,-0.421)
PERST_N: R16.1 U1.135 U4.C24
PORST_N: R11.2 R13.1 U4.C21 | length 0.9
  Top w0.203: R13.1@6.733,3.175 6.733,3.225 7.262,3.754 7.262,3.808 R11.2@7.29,3.835
PORST_N_1: R11.1 U1.138 | length 2.4
  Top w0.102: U1.138@5.4,2.45 6.235,2.45 6.455,2.671 6.455,3.413 6.661,3.619 6.661,3.761 R11.1@6.735,3.835
PWM0: U1.45 U4.B11
PWM1: U1.46 U4.B12
REF_CLKO: R10.1 U4.C23
REF_CLKO_1: R10.2 U1.136 | length 1.6
  Top w0.203: U1.136@5.4,1.95 5.405,1.955 R10.2@6.984,1.955
RF_DIFF+: C56.1 C59.2 L5.1 | length 1.5
  Top w0.092: L5.1@2.794,12.548 2.821,12.575 C56.1@3.353,12.575 ; C56.1@3.353,12.624 3.499,12.624 3.529,12.654 3.529,12.704 3.95,13.125 C59.2@4,13.125
RF_DIFF-: C57.1 C58.1 L4.1 | length 1.2
  Top w0.092: C57.1@4,12.575 C58.1@4.6,12.575 C58.1@4.623,12.598 ; C58.1@4.597,12.598 4.6,12.601 L4.1@4.6,13.125
RF_HP+: C55.1 C56.2 L2.2 | length 1.2
  Top w0.092: C55.1@2.794,11.43 2.839,11.475 L2.2@3.4,11.475 3.4,12.011 C56.2@3.404,12.014
RF_HP-: C54.1 C57.2 L3.2 | length 1.2
  Top w0.092: C57.2@4.013,12.04 4,12.026 C57.2@4,12.025 L3.2@4,11.475 C54.1@4.6,11.475 4.603,11.475 C54.1@4.623,11.455
RF_LP: C60.1 C61.1 L6.2 L7.1 | length 1.9
  Top w0.092: C60.1@2.794,13.64 2.829,13.675 L6.2@3.4,13.675 3.35,13.675 3.271,13.754 3.271,13.854 3.2,13.925 C61.1@3.2,14.225 3.25,14.225 L7.1@3.8,14.225
RF_LP+: C51.2 C53.1 L2.1 R9.1 U1.5 U1.6 | length 4.2
  Top w0.092: U1.6@2.9,7.32 2.936,7.356 2.936,7.744 U1.5@3.15,7.958 ; U1.5@3.15,8.2 3.15,8.832 3.272,8.954 3.272,9.292 C51.2@3.305,9.325 ; C51.2@3.3,9.325 3.374,9.399 3.537,9.399 3.783,9.645 3.783,9.67 3.813,9.7 3.925,9.7 C53.1@3.925,10.3 ; L2.1@3.404,10.922 3.453,10.922 3.529,10.846 3.529,10.746 3.925,10.35 C53.1@3.925,10.3 C53.1@3.937,10.312
RF_LP-: C52.1 C53.2 L3.1 R12.1 U1.3 U1.4 | length 5.3
  Top w0.092: U1.4@3.4,7.32 3.456,7.376 3.456,7.723 3.582,7.85 3.582,8.342 4.092,8.852 4.277,9.037 4.277,9.476 4.529,9.728 4.671,9.728 4.729,9.67 4.729,9.62 5.15,9.199 C52.1@5.2,9.199 ; L3.1@4,10.925 4.027,10.925 4.106,10.846 4.106,10.719 4.475,10.35 C53.2@4.475,10.305 ; C53.2@4.47,10.312 4.47,10.255 C53.2@4.505,10.22 ; R12.1@4.535,9.768 4.475,9.828 4.475,10.19 C53.2@4.547,10.262
RF_NOTCH: C59.1 C60.2 L4.2 L6.1 | length 2.1
  Top w0.092: C60.2@2.794,13.106 2.813,13.125 L6.1@3.4,13.125 ; L6.1@3.404,13.106 3.431,13.106 3.529,13.204 3.529,13.254 3.95,13.675 C59.1@4,13.675 L4.2@4.6,13.675 4.638,13.675 L4.2@4.648,13.665
RXD0: U1.31 U4.B2
RXD1: U1.148 U4.C5
RXD2: U1.48 U4.B14
SD_CD: U1.50 U4.B16
SD_CLK: R22.1 U4.B19
SD_CLK_1: R22.2 U1.54
SD_CMD: U1.55 U4.B20
SD_D0: U1.52 U4.B18
SD_D1: U1.51 U4.B17
SD_D2: U1.57 U4.B22
SD_D3: U1.56 U4.B21
SD_WP: U1.49 U4.B15
SPI_CLK: R4.1 R21.2 U1.25 U4.A9 | length 1.9
  Top w0.102: R21.2@-2.718,9.322 -2.715,9.325 R21.2@-2.7,9.325 R4.1@-2.1,9.325 ; R4.1@-2.108,9.322 -2.047,9.322 -1.85,9.125 U1.25@-1.85,8.2
SPI_CLK_1: R4.2 U3.6
SPI_CS0: R5.1 U1.28 U3.1 U4.A12 | length 0.5
  Top w0.102: R5.1@-8.5,13.675 -8.45,13.675 R5.1@-8.376,13.749 ; U3.1@-7.405,15.14 -7.28,15.265 U3.1@-7.112,15.265
SPI_CS1: R19.2 R20.2 U1.24 U4.A8 | length 0.6
  Top w0.102: R19.2@-0.279,9.322 -0.276,9.326 R20.2@0.279,9.326
SPI_MISO: U1.26 U3.2 U4.A10
SPI_MOSI: R18.2 U1.27 U3.5 U4.A11
SPIFLASH_NRESET: R7.1 U3.7
SPIFLASH_NWP: R6.1 U3.3 | length 0.1
  Top w0.102: U3.3@-7.229,12.776 U3.3@-7.137,12.776
TXD0: R17.2 U1.30 U4.B1
TXD1: R14.1 U1.147 U4.C6
TXD2: U1.47 U4.B13
USB_D+: U1.61 U4.B23 | length 18.5
  Top w0.091: U4.B23@-10,-11.78 -9.546,-12.234 -9.546,-12.252 -9.492,-12.306 -9.363,-12.306 -9.093,-12.036 -9.093,-1.139 -7.991,-0.037 -7.991,1.255 -7.578,1.668 v1(-7.164,1.668)
  Top w0.092: U1.61@-5.72,1.7 -5.712,1.708 -5.193,1.708 v1(-5.185,1.716)
  Bottom w0.092: v1(-7.164,1.668) -7.148,1.651 -6.911,1.651 -6.854,1.708 -5.193,1.708 v1(-5.185,1.716)
USB_D-: U1.62 U4.B24 | length 16.6
  Top w0.091: U4.B24@-10,-13.05 -9.546,-12.596 -9.546,-12.578 -9.492,-12.524 -9.272,-12.524 -8.875,-12.127 -8.875,-1.229 -7.772,-0.127 -7.772,1.164 -7.543,1.393 -6.657,1.393 U1.62@-6.601,1.449
USB_VRT: R24.1 U1.59
VDD_FLASH: R6.2 R7.2 U3.8 U4.A7 | length 12.4
  Top w0.203: R7.2@-8.5,14.625 -6.482,14.625 -5.131,15.977 -0.063,15.977 ; U4.A7@0,18.192 -0.063,18.129 -0.063,15.977 ; U3.8@0.824,15.305 0.608,15.305 -0.063,15.977
XTALIN: U1.151 X3.3
pads on no net: U1.9 U1.11 U1.12 U1.37 U1.153 U2.A2 U2.A8 U2.E2 U2.E8 U2.R3 U2.R7

## Polygon pours and split planes (outlines as drawn)
LXBK on Top "Top-LXBK" (solid, remove dead copper, pour order 1): 4.928,-2.337 4.928,-2.978 5.461,-2.978 5.461,-4.738 7.425,-4.738 7.425,-3.279 6.401,-3.279 6.401,-2.337
1V2 on Top "Top-1V2" (solid, remove dead copper, pour order 0): 4.95,-4.873 4.95,-6.652 7.299,-6.652 7.299,-5.997 9.097,-5.997 9.097,-3.994 7.525,-3.994 7.525,-4.873
1V2 on Bottom "1V2_L06_P002" (solid, pour order 2): -8.8,2.8 -4.877,2.8 -4.877,6.299 -1.3,6.299 -1.3,9.5 -0.4,9.5 -0.4,6.299 3.632,6.299 3.632,4.4 6.8,4.4 6.8,3.8 4.089,3.8 4.089,1 6.9,1 6.9,0.3 3.886,0.3 3.886,-1.524 5.8,-1.524 5.8,-3.4 9,-3.4 9,-6.9 4.8,-6.9 4.8,-2.972 2.4,-2.972 -1.6,-2.972 -1.6,-4.5 -3.1,-4.5 -3.1,-2.972 -5.639,-2.972 -5.639,2.1 -8.8,2.1
3V3 on PWR (split plane): 9.99,-16.89 8.653,-16.89 8.651,-16.888 8.609,-16.86 8.56,-16.85 8.51,-16.86 8.468,-16.888 8.467,-16.89 7.829,-16.89 7.829,-8.1 7.82,-8.05 7.792,-8.008 7.75,-7.98 7.7,-7.971 5.929,-7.971 5.929,-4 5.92,-3.95 5.892,-3.908 5.85,-3.88 5.8,-3.871 4.929,-3.871 4.929,2.6 4.92,2.65 4.892,2.692 4.85,2.72 4.8,2.729 -9.99,2.729 -9.99,18.19 9.99,18.19
1V8 on PWR (split plane): 4.671,-4 4.68,-4.05 4.708,-4.092 4.75,-4.12 4.8,-4.129 5.671,-4.129 5.671,-8.1 5.68,-8.15 5.708,-8.192 5.75,-8.22 5.8,-8.229 7.571,-8.229 7.571,-16.871 -9.871,-16.871 -9.871,2.471 4.671,2.471
GND on GND (split plane): 10.244,-17.144 -10.244,-17.144 -10.244,18.444 10.244,18.444

## Other copper
Bottom:
  rectangle net GND: -3.6,-0.8 2.4,5.2
PWR (plane layer: these items are gaps in the copper):
  lines w0.254: -9.109,-17.31 -9.093,-17.294 ; 6.456,-17 -10,-17 ; 8.56,-16.98 8.89,-17.31 ; -10,-17 -10,2.6 4.8,2.6 4.8,-4 5.8,-4 5.8,-8.1 7.7,-8.1 7.7,-17 -10,-17

## Silkscreen, mask and mechanical layers (free items; w line width, h text height)
Silkscreen Top:
  text "NW0101 Rev.A" at 7.5,-16.3 h0.51 r90
Drill Drawing:
  lines w0.025: -5.1,0 -5.099,0 ; 0,-7.5 0.001,-7.5 ; 0.6,3.1 0.601,3.1 ; 0,7.5 0.001,7.5 0,7.5 ; 5.1,0 5.101,0
  lines w0.254: -10.97,3.1 -0.67,3.1 ; -10.97,7.5 -1.27,7.5 ; -9.7,-0.71 -9.7,3.1 ; -9.7,11.31 -9.7,7.5 ; -8.91,15.349 -5.1,15.349 ; -5.1,1.27 -5.1,16.619 ; 1.27,-7.5 16.04,-7.5 ; 1.27,7.5 16.04,7.5 ; 5.1,1.27 5.1,16.619 ; 8.91,15.349 5.1,15.349 ; 14.77,-1.714 14.77,-7.5 ; 14.77,1.714 14.77,7.5 ; -9.7,3.1 -10.335,0.56 -9.065,0.56 -9.7,3.1 ; -9.7,7.5 -9.065,10.04 -10.335,10.04 -9.7,7.5 ; -5.1,15.349 -7.64,15.984 -7.64,14.714 -5.1,15.349 ; 5.1,15.349 7.64,14.714 7.64,15.984 5.1,15.349 ; 14.77,-7.5 15.405,-4.96 14.135,-4.96 14.77,-7.5 ; 14.77,7.5 14.135,4.96 15.405,4.96 14.77,7.5
  text "10.2mm" at -3.442,14.689 h1.27
  text "4.4mm" at -17.158,10.358 h1.27
  text "15.0mm" at 11.047,-0.953 h1.27